# Altium PCB VoiceTouch_PCB_L6.PcbDoc (part 1 of 2)
Units mm, origin at the board's own origin, x right, y up, seen from the top; angles counter-clockwise.
Board outline 39 x 33.1 mm, 6 copper layers (L1, L2 (GND), L3, L4 (PWR), L5 (GND), L6), stack 0.726 mm thick; 65 components, 88 nets, 317 pads, 56 vias.
Unrouted connection lines stored in the file: 149.
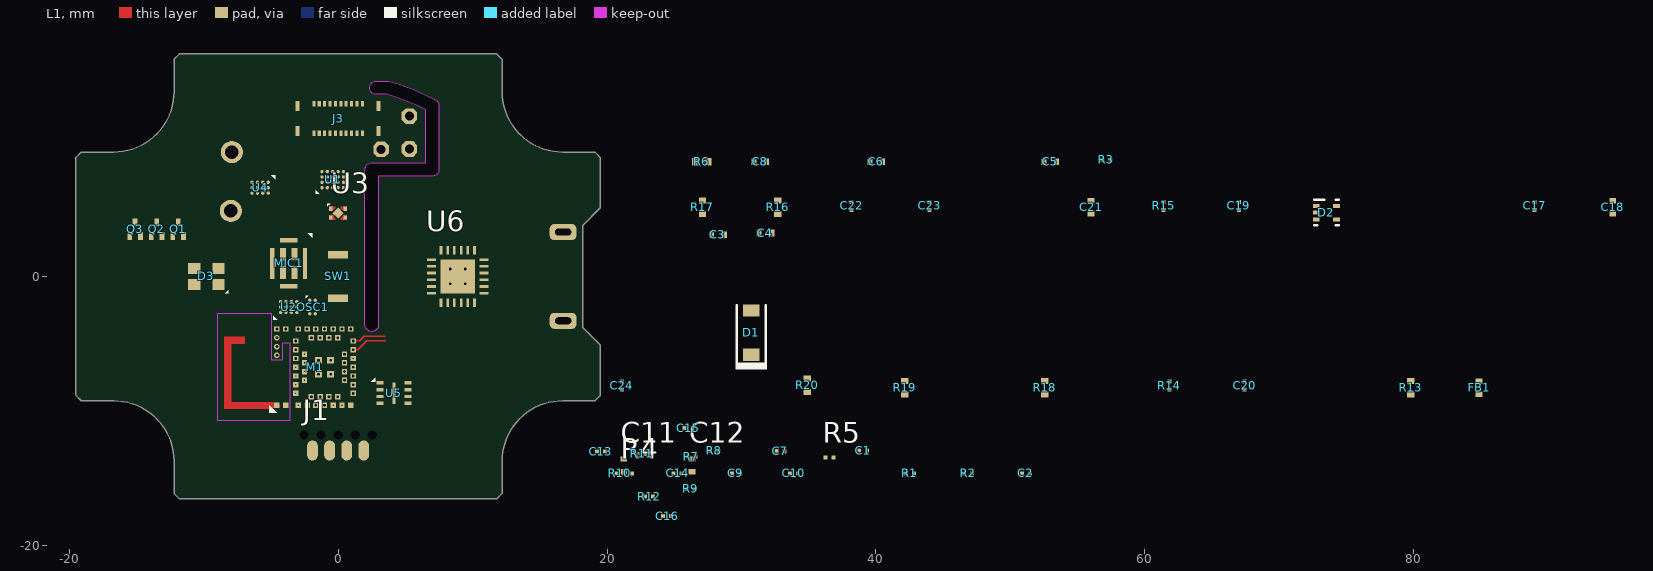
[diagram p0: L1 view]
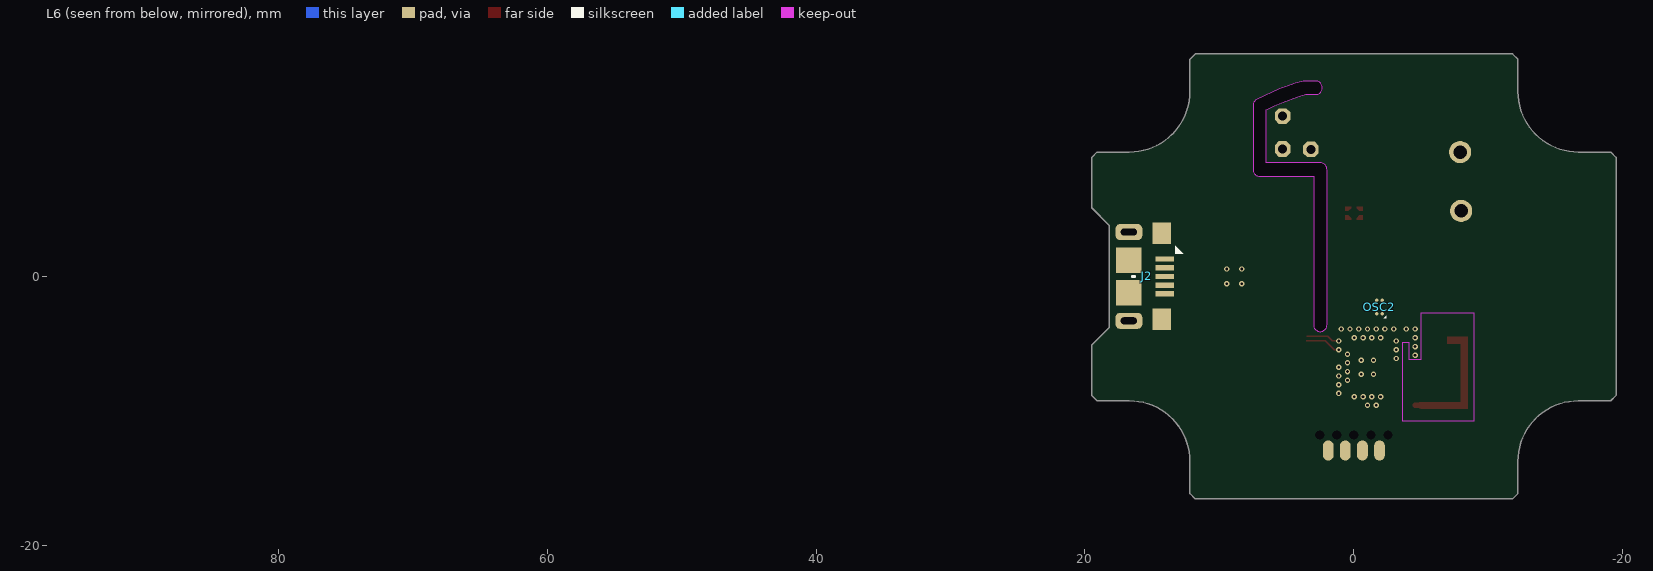
[diagram p1: L6 view, seen from below]
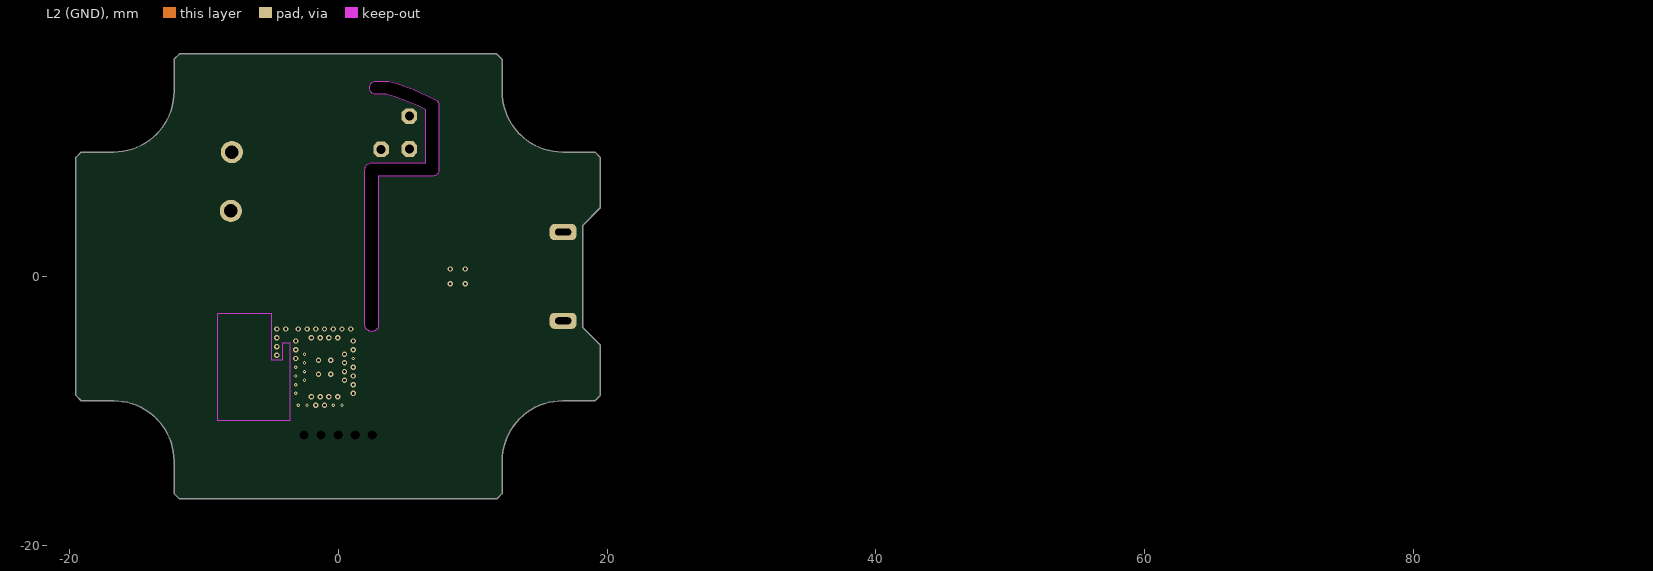
[diagram p2: L2 (GND)]
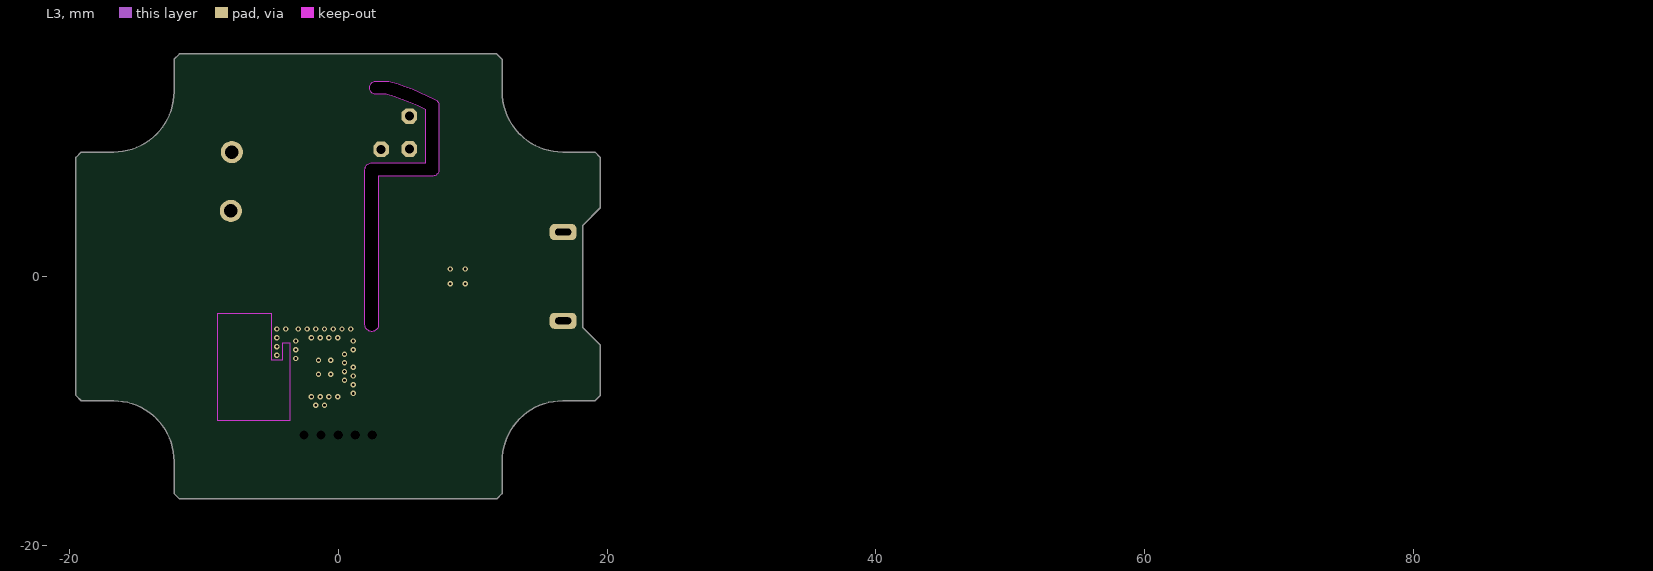
[diagram p3: L3]
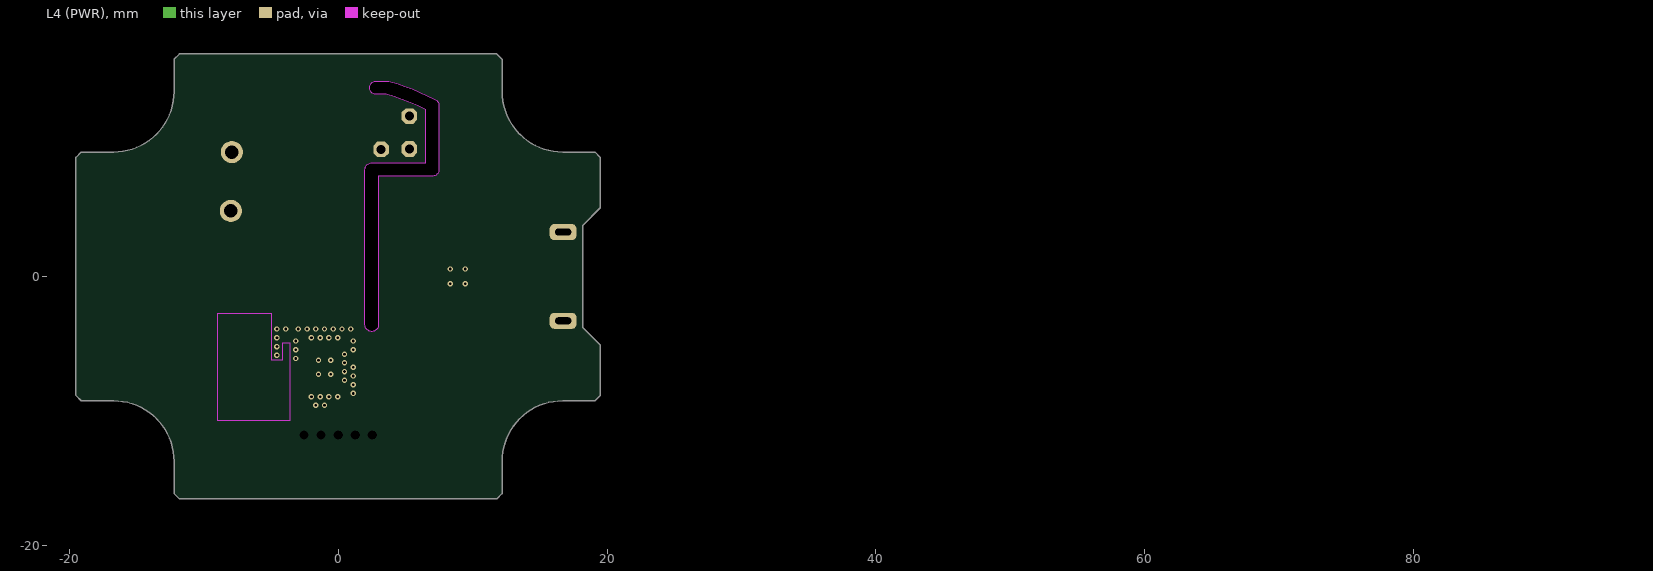
[diagram p4: L4 (PWR)]
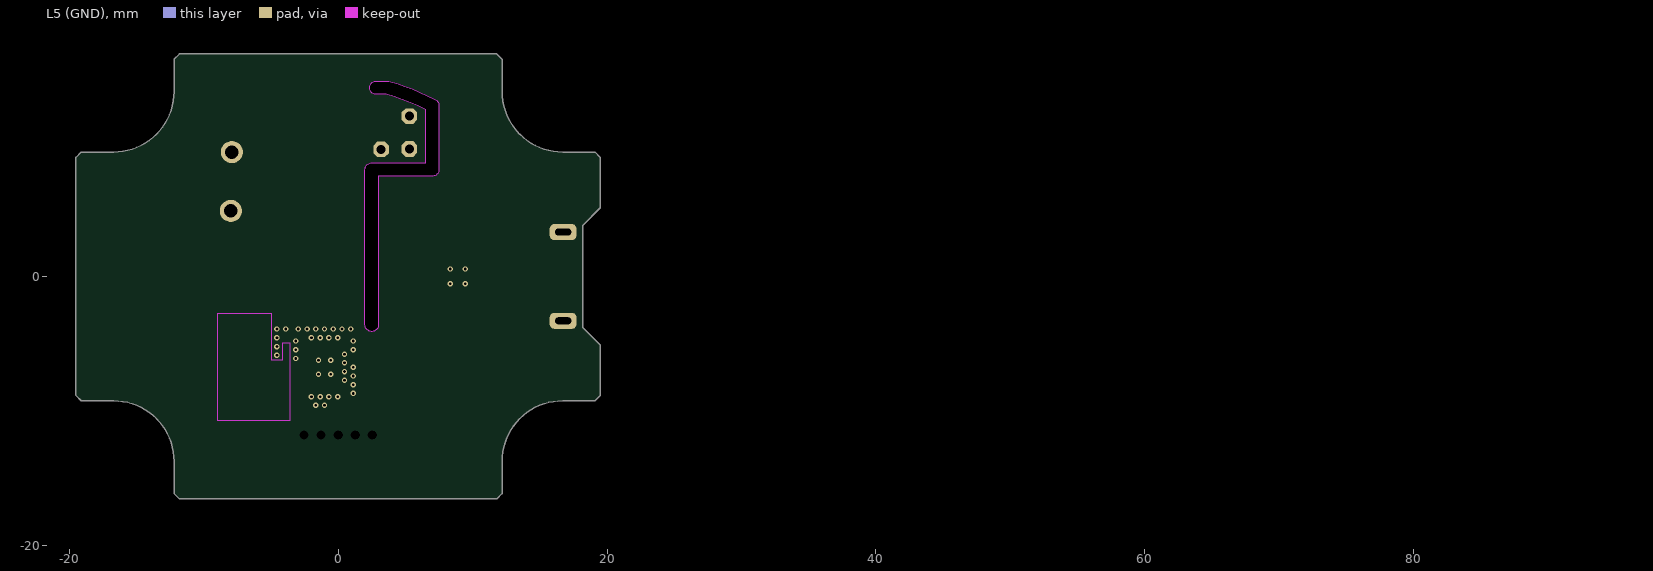
[diagram p5: L5 (GND)]

## Layer stack, top to bottom
Top Solder: solder mask 0.02, SM-001, Dk 4.2
L1: signal copper 0.012
Dielectric 1: prepreg 0.06, PP-01, Dk 4.5
L2 (GND): signal copper 0.018
Dielectric 2: core 0.2, Core-01, Dk 4.5
L3: signal copper 0.018
Dielectric 3: prepreg 0.11, PP-02, Dk 4.5
L4 (PWR): signal copper 0.018
Dielectric 4: core 0.2, Core-01, Dk 4.5
L5 (GND): signal copper 0.018
Dielectric 5: prepreg 0.06, PP-01, Dk 4.5
L6: signal copper 0.012
Bottom Solder: solder mask 0.02, SM-001, Dk 4.2

## Board outline
-19.1,-9.25 -16.7,-9.25 cw(c-16.7,-13.75) -12.2,-13.75 -12.2,-16.15 -11.8,-16.55 11.8,-16.55 12.2,-16.15 12.2,-13.75 cw(c16.7,-13.75) 16.7,-9.25 19.1,-9.25 19.5,-8.85 19.5,-5.103 18.207,-3.81 18.207,3.81 19.5,5.103 19.5,8.85 19.1,9.25 16.7,9.25 cw(c16.7,13.75) 12.2,13.75 12.2,16.15 11.8,16.55 -11.8,16.55 -12.2,16.15 -12.2,13.75 cw(c-16.7,13.75) -16.7,9.25 -19.1,9.25 -19.5,8.85 -19.5,-8.85
cut-out: 2,-3.6 2,7.95 cw(c2.5,7.95) 2.5,8.45 6.5,8.45 6.5,12.399 ccw(c0,0) 3.581,13.534 2.848,13.534 cw(c2.848,14.034) 2.848,14.535 3.645,14.535 cw(c3.645,14.034) 3.771,14.519 cw(c0,0) 7.173,13.174 cw(c7,12.705) 7.5,12.705 7.5,7.95 cw(c7,7.95) 7,7.45 3,7.45 3,-3.6 cw(c2.5,-3.6)

## Design rules (kind name [scope] priority, off if disabled: settings)
AcuteAngle [All] p1: minimum=4.49000000000000E+0001 checktracksonly=FALSE
BoardOutlineClearance BoardOutlineClearance_Silk [OnLayer('Top Overlay') or OnLayer('Bottom Overlay')] p1: gap=0 ignorepadtopadclearanceinfootprint=FALSE
BoardOutlineClearance BoardOutlineClearance_Text [IsText] p2: gap=0 ignorepadtopadclearanceinfootprint=FALSE
BoardOutlineClearance BoardOutlineClearance_EdgeComponents [InPadClass('Edge Pads')] p3: gap=0 ignorepadtopadclearanceinfootprint=FALSE
BoardOutlineClearance [All] p4: gap=0.3 ignorepadtopadclearanceinfootprint=FALSE except(0: THPad-CutoutEdge)
Clearance Clearance_Fiducials [InComponentClass('Fiducial') vs InComponentClass('Fiducial')] p1: gap=0 ignorepadtopadclearanceinfootprint=FALSE
Clearance "Clearance_ANTENNA to Keepout" [InNet('ANTENNA_STRIP') vs OnLayer('Keep-Out Layer')] p2: gap=0 ignorepadtopadclearanceinfootprint=FALSE
Clearance "Clearance_Poly to Keepout" [IsRegion vs OnLayer('Keep-Out Layer')] p3: gap=0.1 ignorepadtopadclearanceinfootprint=FALSE
Clearance "Clearance_Poly to Inner Layers" [IsRegion and InLayerClass('Internal Layers')] p4: gap=0.15 ignorepadtopadclearanceinfootprint=FALSE
Clearance "Clearance_Poly to all" [IsRegion and InNet('GND')] p5: gap=0.15 ignorepadtopadclearanceinfootprint=FALSE
Clearance Clearance_NPTH [(InPadClass('NPTH'))] p6: gap=0.2 ignorepadtopadclearanceinfootprint=FALSE
Clearance [All] p7: gap=0.1 ignorepadtopadclearanceinfootprint=FALSE
ComponentClearance ComponentClearance_J2_J4 [InComponent('J2') vs InComponent('J4')] p1: gap=0 collisioncheckmode=3 verticalgap=0 showdistances=FALSE
ComponentClearance ComponentClearance_R5_R2 [InComponent('R5') vs InComponent('R2')] p2: gap=0 collisioncheckmode=3 verticalgap=0 showdistances=FALSE
ComponentClearance ComponentClearance_R8_R12 [InComponent('R8') vs InComponent('R12')] p3: gap=0 collisioncheckmode=3 verticalgap=0 showdistances=FALSE
ComponentClearance ComponentClearance_TESTPOINTS [InComponentClass('TESTPOINTS')] p4: gap=0 collisioncheckmode=3 verticalgap=0 showdistances=FALSE
ComponentClearance [All] p5: gap=0.1 collisioncheckmode=3 verticalgap=0.1 showdistances=FALSE
DiffPairsRouting [All] p1: maxlimit=0.165 minlimit=0.155 mostfreqgap=0.165 toplayer_mingap=0.165 toplayer_minwidth=0.105 toplayer_maxwidth=0.105 toplayer_prefwidth=0.105 midlayer1_maxgap=0.155 midlayer1_prefgap=0.155 midlayer1_minwidth=0.13 midlayer1_maxwidth=0.13 midlayer1_prefwidth=0.13 midlayer2_maxgap=0.155 midlayer2_prefgap=0.155 midlayer2_minwidth=0.13 midlayer2_maxwidth=0.13 midlayer2_prefwidth=0.13 midlayer3_mingap=0.165 midlayer3_minwidth=0.105 midlayer3_maxwidth=0.105 midlayer3_prefwidth=0.105 midlayer4_mingap=0.165 midlayer4_minwidth=0.105 midlayer4_maxwidth=0.105 midlayer4_prefwidth=0.105 bottomlayer_mingap=0.165 bottomlayer_minwidth=0.105 bottomlayer_maxwidth=0.105 bottomlayer_prefwidth=0.105 maxuncoupledlength=12.7
HoleSize [All] p1: absolutevalues=TRUE maxlimit=6.5 minlimit=0.1 maxpercent=80.000 minpercent=20.000
HoleToHoleClearance [All] p1: gap=0.2 allowstackedmicrovias=TRUE
Length [InNetClass('Xtal')] p1: maxlimit=2540 minlimit=0
MinimumAnnularRing MinimumAnnularRing_ThermalPadVias [IsVia and InAnyComponent] p1: minimumring=0.1
MinimumAnnularRing MinimumAnnularRing_MicroVia [IsVia AND (HoleSize = 0.1)] p2: minimumring=0.05
MinimumAnnularRing [All] p3: minimumring=0.1
MinimumSolderMaskSliver [All] p1: minsoldermaskwidth=0.03
PlaneClearance [All] p1: clearance=0.2
PlaneConnect [All] p1: planeconnectstyle=Direct reliefexpansion=0.1 reliefentries=4 reliefconductorwidth=0.1 reliefairgap=0.1
PolygonConnect [All] p1: connectstyle=Direct reliefconductorwidth=0.1 reliefentries=4 polygonreliefangle="90 Angle" airgapwidth=0.1
RoutingVias ThermalPadVias [IsVia and InAnyComponent] p1: holewidth=0.2 width=0.45 viastyle="Through Hole" minholewidth=0.2 minwidth=0.4 maxholewidth=0.25 maxwidth=0.5
RoutingVias [All] p2: holewidth=0.2 width=0.4 viastyle="Through Hole" minholewidth=0.1 minwidth=0.2 maxholewidth=0.3 maxwidth=0.55
SMDEntry [All] p1: side=TRUE corner=TRUE anyangle=TRUE
SilkToSilkClearance [All] p1: silktosilkclearance=0
SilkToSolderMaskClearance [IsPad] p1: minsilkscreentomaskgap=0.1 clearancetoexposedcopper=TRUE
SolderMaskExpansion [All] p1: expansion=0.07 istentingtop=FALSE useseparateexpansions=TRUE expansionbottom=0.07 istentingbottom=FALSE
Width Width_Power [InNet('+*') or InNet('GND')] p1: maxlimit=1 minlimit=0.15 preferedwidth=0.25
Width [All] p2: maxlimit=1 minlimit=0.1 preferedwidth=0.1
21 further rules are at their usual default settings.

## Classes and differential pairs
net class DIFF90: USB_CP_D_N USB_CP_D_P
net class "GPIO Restrictions": P0.22 P0.23 P0.25 P0.26 P0.27 P0.28 P0.29 P0.30 P.0.31
differential pair USB_CP_D: +USB_CP_D_P -USB_CP_D_N

## Components (designator, comment, footprint, x,y, rotation, side; value= is the part's Value field where it differs from the comment)
C1 "100nF" CAPC0603X03N 39.05,-12.95 r0 top
C2 "100nF" CAPC0603X03N 51.155,-14.649 r0 top
C3 "4.7uF" CAPC1005X06N 28.25,3.1 r0 top
C4 "1uF" CAPC1005X06N 31.775,3.225 r0 top
C5 "2.2uF" CAPC1005X06N 52.959,8.527 r0 top
C6 "1uF" CAPC1005X06N 40.009,8.527 r0 top
C7 "100nF" CAPC0603X03N 32.9,-13 r0 top
C8 "4.7uF" CAPC1005X06N 31.383,8.527 r0 top
C9 "100nF" CAPC0603X03N 29.579,-14.649 r0 top
C10 "100nF" CAPC0603X03N 33.904,-14.649 r0 top
C11 "1uF" CAPC1005X06N 21.254,-14.049 r90 top
C12 "1uF" CAPC1005X06N 26.329,-14.049 r90 top
C13 "100nF" CAPC0603X03N 19.55,-13.025 r0 top
C14 "100nF" CAPC0603X03N 25.254,-14.649 r0 top
C15 "100nF" CAPC0603X03N 26.05,-11.275 r0 top
C16 "100nF" CAPC0603X03N 24.475,-17.825 r0 top
C17 "100nF" CAPC0603X03N 89,5.25 r90 top
C18 "4.7uF" CAPC1005X06N 94.8,5.15 r90 top
C19 "100nF" CAPC0603X03N 67,5.25 r90 top
C20 "100nF" CAPC0603X03N 67.431,-8.123 r90 top
C21 "1uF" CAPC1005X06N 56,5.15 r90 top
C22 "100nF" CAPC0603X03N 38.2,5.25 r90 top
C23 "100nF" CAPC0603X03N 44,5.25 r90 top
C24 "100nF" CAPC0603X03N 21.104,-8.123 r90 top
D1 "B140HW-7" SOD-123 30.725,-4.175 r90 top
D2 "TPD2E001DRLRG4" DRL0005A 73.5,4.75 r0 top
D3 "ASMB-KTF0-0A306" LED_ASMB-KTF0-0A306 -9.8,0 r180 top
FB1 "1K" INDC1005X05N 84.857,-8.273 r90 top
J1 "SOICbite" SOICBITE 0,-13.696 r0 top
J2 "10118193-0001LF" 10118193 15.4,0 r270 bottom
J3 "BM20B(0.8)-20DS-0.4V(53)" BM20B(0.8)-20DS-0.4V(53) 0,11.746 r0 top
M1 "ANNA-B112-00B" ANNA-B112 -1.711,-6.75 r90 top
MIC1 "SPK0641HT4H-1" MIC_SPK0838HT4H-1 -3.675,0.975 r180 top
OSC1 "SIT1532AC-J5-DCC-32.768E" SIT1532 -1.9,-2.275 r270 top
OSC2 "SIT8021AI-J4-18S-2.048000E" SIT1532 -1.9,-2.275 r90 bottom
Q1 "DTC143ZMT2L" SOTFL40P120X55-3N -11.9,3.5 r90 top
Q2 "DTC143ZMT2L" SOTFL40P120X55-3N -13.5,3.5 r90 top
Q3 "DTC143ZMT2L" SOTFL40P120X55-3N -15.1,3.5 r90 top
R1 "100K" RESC0603X02N 42.53,-14.649 r0 top
R2 "10K" RESC0603X02N 46.855,-14.649 r0 top
R3 "100R" RESC0603X02N 57.134,8.677 r0 top
R4 "10K" RESC0603X02N 21.554,-14.649 r0 top
R5 "10K" RESC0603X02N 36.555,-13.449 r0 top
R6 "10K NTC" NTC1005X05N 27.058,8.527 r0 top
R7 "100R" RESC0603X02N 26.275,-13.4 r0 top
R8 "100R" RESC0603X02N 27.975,-12.975 r0 top
R9 "10K" RESC0603X02N 26.225,-15.8 r0 top
R10 "10K" RESC0603X02N 20.954,-14.649 r0 top
R11 "10K" RESC0603X02N 22.575,-13.2 r0 top
R12 "10K" RESC0603X02N 23.125,-16.375 r0 top
R13 "0R" RESC1005X04N 79.782,-8.273 r90 top
R14 "100R" RESC0603X02N 61.831,-8.123 r90 top
R15 "10K" RESC0603X02N 61.4,5.25 r90 top
R16 "0R" RESC1005X04N 32.7,5.15 r90 top
R17 "0R" RESC1005X04N 27.1,5.15 r90 top
R18 "100R" RESC1005X04N 52.555,-8.273 r90 top
R19 "33R" RESC1005X04N 42.13,-8.273 r90 top
R20 "47R" RESC1005X04N 34.9,-8.1 r90 top
SW1 "TL3780AF240QG" TL3780 -0.001,0 r270 top
U1 "BQ25150YFPR" YFP0020ACAC -0.4,7.2 r90 top
U2 "NDP100B0" NDP100B0_BGA12C40P3X4_139X176X55 -3.675,-2.275 r90 top
U3 "TCR3UM09A,LF" DQN-4 0,4.708 r0 top
U4 "DA7280-00V42" BGA12C40P3X4_135X175X57 -5.8,6.6 r270 top
U5 "MX25R8035FZUIL0" USON8_3X2 4.15,-8.675 r0 top
U6 "CP2102N-A02-GQFN24R" QFN50P400X400X75_HS-25N_CP2104 8.899,0 r0 top

## Footprints (in the part's own frame and the unit in brackets; to place one, negate y for a bottom-side part, rotate by r counter-clockwise, add the part's x,y. Pads: shape width x height; smd on the part's side, far side on the other; paste and mask are expansions set on the pad)
10118193 [mm]
  rect 0.4x1.35 smd mask+0.05: 1(-1.3,1.338) 2(-0.65,1.338) 3(0,1.338) 4(0.65,1.338) 5(1.3,1.338)
  rect 1.6x1.4 smd: 6(-3.2,1.113) 7(3.2,1.113)
  rrect60% 1.2x2 hole 0.5 slot 1.2 at 90 deg: 8(-3.3,-1.338) 9(3.3,-1.338)
  rect 1.9x1.9 smd paste-10: 10(-1.2,-1.338) 11(1.2,-1.338)
  silkscreen extent -2.29,-1.09 0,2.73, body extent -3.93,-4.1 3.93,1.56, height 2.85
ANNA-B112 [mm]
  rect 0.4x0.4 smd mask+0.05: 1(-2.84,2.84) 2(-2.84,2.19) 3(-2.84,1.248) 4(-2.84,0.598) 5(-2.84,-0.052) 6(-2.84,-0.702) 7(-2.84,-1.352) 8(-2.84,-2.002) 9(-2.84,-2.652) 10(-2.19,0.273) 11(-2.19,-0.377) 12(-2.19,-1.027) 13(-2.19,-1.677) 14(-1.95,-2.84) 15(-1.3,-2.84) 16(-0.65,-2.84) 17(0,-2.84) 18(0.65,-2.84) 19(1.3,-2.84) 20(1.95,-2.84) 21(-0.975,-2.19) 22(-0.325,-2.19) 23(0.325,-2.19) 24(0.975,-2.19) 25(2.84,-2.652) 26(2.84,-2.002) 27(2.84,-1.352) 28(2.84,-0.702) 29(2.84,-0.052) 30(2.84,0.598) 31(2.84,1.248) 32(2.84,2.19) 33(2.84,2.84) 34(2.19,-1.677) 35(2.19,-1.027) 36(2.19,-0.377) 37(2.19,0.273) 38(1.95,1.435) 39(1.3,1.435) 40(0.65,1.435) 41(0,1.435) 42(-0.65,1.435) 43(-1.3,1.435) 44(-1.95,1.435) 45(0.975,0.785) 46(0.325,0.785) 47(-0.325,0.785) 48(-0.975,0.785)
  rect 0.5x0.5 smd mask+0.05: 49(-0.52,-0.252) 50(-0.52,-1.152) 51(0.52,-0.252) 52(0.52,-1.152)
  silkscreen extent -3.39,2.84 -2.82,3.41, body extent -3.25,-3.25 3.25,3.25, height 1.26
BGA12C40P3X4_135X175X57 [mm] "BGA, 12-Leads, Body 1.35x1.75mmx0.57mm, Pitch 0.40mm"
  round 0.25 smd mask+0.05: A1(-0.4,0.6) A2(0,0.6) A3(0.4,0.6) B1(-0.4,0.2) B2(0,0.2) B3(0.4,0.2) C1(-0.4,-0.2) C2(0,-0.2) C3(0.4,-0.2) D1(-0.4,-0.6) D2(0,-0.6) D3(0.4,-0.6)
  round 0.25 on Mech2 mask+0.05: A1(-0.4,0.6)
  silkscreen extent -0.93,0.82 -0.63,1.12, body extent -0.67,-0.87 0.67,0.87, height 0.58
BM20B(0.8)-20DS-0.4V(53) [mm]
  rect 0.23x0.42 smd mask+0.03: 1(-1.8,-1.09) 2(-1.8,1.09) 3(-1.4,-1.09) 4(-1.4,1.09) 5(-1,-1.09) 6(-1,1.09) 7(-0.6,-1.09) 8(-0.6,1.09) 9(-0.2,-1.09) 10(-0.2,1.09) 11(0.2,-1.09) 12(0.2,1.09) 13(0.6,-1.09) 14(0.6,1.09) 15(1,-1.09) 16(1,1.09) 17(1.4,-1.09) 18(1.4,1.09) 19(1.8,-1.09) 20(1.8,1.09)
  rect 0.3x0.75 smd mask+0.03: SH1(-3.01,-0.925) SH2(-3.01,0.925) SH3(3.01,-0.925) SH4(3.01,0.925)
  body extent -3.24,-1.15 3.24,1.15, height 0.81
CAPC0603X03N [mm] "Chip Capacitor, 2-Leads, Body 0.60x0.30mm, IPC Medium Density"
  rect 0.3x0.3 smd mask+0.05: 1(-0.3,0) 2(0.3,0)
  L1 pour cut-out: -0.15,0.15 0.15,0.15 0.15,-0.15 -0.15,-0.15
  body extent -0.3,-0.15 0.3,0.15, height 0.3
CAPC1005X06N [mm] "Chip Capacitor, 2-Leads, Body 1.00x0.50mm, IPC Medium Density"
  rect 0.4x0.5 smd mask+0.07: 1(-0.475,0) 2(0.475,0)
  L1 pour cut-out: -0.275,0.25 0.275,0.25 0.275,-0.25 -0.275,-0.25
  body extent -0.53,-0.28 0.53,0.28, height 0.55
DQN-4 [mm]
  rect 0.25x0.31 smd paste-0.142 mask-0.05: 1(-0.535,0.325) 2(-0.535,-0.325) 3(0.535,-0.325)
  rect 0.25x0.31 smd paste-2 mask-0.05: 4(0.535,0.325)
  rect 0.58x0.58 smd rot 45 paste-0.065 mask-0.051: 5(0,0)
  L1 region: -0.66,-0.17 -0.66,-0.48 -0.2,-0.48 -0.2,-0.379 -0.409,-0.17
  L1 region: -0.66,0.17 -0.66,0.48 -0.2,0.48 -0.2,0.379 -0.409,0.17
  L1 region: 0.66,0.17 0.66,0.48 0.2,0.48 0.2,0.379 0.409,0.17
  L1 region: 0.66,-0.17 0.66,-0.48 0.2,-0.48 0.2,-0.379 0.409,-0.17
  silkscreen extent -0.8,0.5 -0.6,0.7, body extent -0.5,-0.5 0.5,0.5, height 0.35
DRL0005A [mm]
  rect 0.5x0.3 smd mask+0.05: 1(-0.75,0.5) 2(-0.75,0) 3(-0.75,-0.5) 4(0.75,-0.5) 5(0.75,0.5)
  silkscreen extent -0.9,-0.95 0.9,0.95, body extent -0.85,-0.85 0.85,0.85, height 0.62
INDC1005X05N [mm] "Chip Inductor, 2-Leads, Body 1.00x0.50mm, IPC Medium Density"
  rect 0.4x0.5 smd mask+0.07: 1(-0.475,0) 2(0.475,0)
  L1 pour cut-out: -0.275,0.25 0.275,0.25 0.275,-0.25 -0.275,-0.25
  body extent -0.53,-0.28 0.53,0.28, height 0.55
LED_ASMB-KTF0-0A306 [mm]
  rect 0.9x0.8 smd mask+0.05: 1(-0.9,0.6) 2(-0.9,-0.6) 3(0.9,-0.6) 4(0.9,0.6)
  silkscreen extent -1.64,1.01 -1.41,1.24, body extent -1.1,-1 1.1,1, height 1.91
MIC_SPK0838HT4H-1 [mm]
  rect 0.45x0.95 smd mask+0.07: 1(-0.425,-0.675) 2(-0.425,0.675) 3(0.425,0.675) 4(0.425,-0.675)
  rect 1.3x0.325 smd mask+0.07: 5(0,-1.712) 7(0,1.713)
  rect 0.325x2.3 smd mask+0.07: 6(-1.212,0) 8(1.213,0)
  silkscreen extent -1.75,-2.25 -1.4,-1.9, body extent -1.5,-2 1.5,2, height 1.02
NDP100B0_BGA12C40P3X4_139X176X55 [mm] "BGA, 12-Leads, Body 1.39x1.76mmx0.55mm, Pitch 0.40mm"
  round 0.25 smd mask+0.04: A1(-0.4,0.6) A2(0,0.6) A3(0.4,0.6) B1(-0.4,0.2) B2(0,0.2) B3(0.4,0.2) C1(-0.4,-0.2) C2(0,-0.2) C3(0.4,-0.2) D1(-0.4,-0.6) D2(0,-0.6) D3(0.4,-0.6)
  silkscreen extent -0.95,0.86 -0.66,1.15, body extent -0.69,-0.88 0.7,0.88, height 0.55
NTC1005X05N [mm] "NTC, 2-Leads, Body 1.00x0.50mm, IPC Medium Density"
  rect 0.55x0.55 smd mask+0.07: 1(-0.45,0) 2(0.45,0)
  body extent -0.5,-0.25 0.5,0.25, height 0.5
QFN50P400X400X75_HS-25N_CP2104 [mm] "QFN, 24-Leads, Body 4.00x4.00mm, Pitch 0.50mm, Thermal Pad 2.70x2.70mm, IPC Medium Density"
  rect 0.65x0.2 smd mask+0.05: 1(-1.95,1.25) 2(-1.95,0.75) 3(-1.95,0.25) 4(-1.95,-0.25) 5(-1.95,-0.75) 6(-1.95,-1.25) 13(1.95,-1.25) 14(1.95,-0.75) 15(1.95,-0.25) 16(1.95,0.25) 17(1.95,0.75) 18(1.95,1.25)
  rect 0.2x0.65 smd mask+0.05: 7(-1.25,-1.95) 8(-0.75,-1.95) 9(-0.25,-1.95) 10(0.25,-1.95) 11(0.75,-1.95) 12(1.25,-1.95) 19(1.25,1.95) 20(0.75,1.95) 21(0.25,1.95) 22(-0.25,1.95) 23(-0.75,1.95) 24(-1.25,1.95)
  rect 2.55x2.55 smd mask+0.05: 25(0,0)
  body extent -2,-2 2,2, height 0.75
RESC0603X02N [mm] "Chip Resistor, 2-Leads, Body 0.60x0.30mm, IPC Medium Density"
  rect 0.3x0.3 smd mask+0.05: 1(-0.3,0) 2(0.3,0)
  L1 pour cut-out: -0.15,0.15 0.15,0.15 0.15,-0.15 -0.15,-0.15
  body extent -0.3,-0.15 0.3,0.15, height 0.23
RESC1005X04N [mm] "Chip Resistor, 2-Leads, Body 1.00x0.50mm, IPC Medium Density"
  rect 0.45x0.55 smd: 1(-0.5,0)
  rect 0.45x0.55 smd mask+0.07: 2(0.5,0)
  L1 pour cut-out: -0.275,0.275 0.275,0.275 0.275,-0.275 -0.275,-0.275
  body extent -0.53,-0.28 0.53,0.28, height 0.35
SIT1532 [mm]
  round 0.25 smd mask+0.05: 1(-0.5,-0.205) 2(0.5,-0.205) 3(0.5,0.205) 4(-0.5,0.205)
  silkscreen extent -0.85,-0.53 -0.65,-0.33, body extent -0.77,-0.42 0.77,0.42, height 0.61
SOD-123 [mm]
  rect 0.915x1.22 smd: 1(-1.638,0) 2(1.638,0)
  silkscreen extent -2.74,-1.18 2.03,1.17, body extent -1.93,-0.9 1.93,0.9, height 1.35
SOICBITE [mil]
  rrect100% 31.5x59.06 smd paste-39.37 mask+1.97: 1(75,29.53) 2(25,29.53) 3(-25,29.53) 4(-75,29.53)
  rrect100% 31.5x59.06 smd far side paste-39.37 mask+1.97: 5(-75,29.53) 6(-25,29.53) 7(25,29.53) 8(75,29.53)
  round 0 hole 27.56 unplated mask-196.85: MH1(-100,75) MH2(-50,75) MH3(0,75) MH4(50,75) MH5(100,75)
SOTFL40P120X55-3N [mm] "SOTFL, 3-Leads, Body 1.20x1.20mm, Pitch 0.40mm, IPC Medium Density"
  rect 0.6x0.35 smd mask+0.05: 1(-0.5,0.4) 2(-0.5,-0.4) 3(0.5,0)
  body extent -0.6,-0.65 0.6,0.65, height 0.55
TL3780 [mm]
  rect 0.55x1.5 smd: 1(-1.625,0) 2(1.625,0)
  body extent -1.75,-1 1.75,1, height 0.6
USON8_3X2 [mil]
  rect 19.68x10 smd mask+1.97: 1(-41,30) 2(-41,10) 3(-41,-10) 4(-41,-30) 5(41,-30) 6(41,-10) 7(41,10) 8(41,30)
  rect 7.87x62.99 smd mask+1.97: 9(0,0)
  silkscreen extent -67,33 -55,45, body extent -48,-39 48,39, height 24
YFP0020ACAC [mm]
  round 0.25 smd paste-0.13 mask+0.038: A1(-0.6,0.8) A2(-0.2,0.8) A3(0.2,0.8) A4(0.6,0.8) B1(-0.6,0.4) B2(-0.2,0.4) B3(0.2,0.4) B4(0.6,0.4) C1(-0.6,0) C2(-0.2,0) C3(0.2,0) C4(0.6,0) D1(-0.6,-0.4) D2(-0.2,-0.4) D3(0.2,-0.4) D4(0.6,-0.4) E1(-0.6,-0.8) E2(-0.2,-0.8) E3(0.2,-0.8) E4(0.6,-0.8)
  silkscreen extent -1.05,1 -0.8,1.25, body extent -0.82,-1.02 0.83,1.03, height 0.5

## Part data
C1 C2 C7 C9 C10 C13 C14 C15 C16 C17 C19 C20 C22 C23 C24: library part GRM033C71C104ME14D, "CAP CER 0.1UF 16V X7S 0201", Case Code (Imperial)=0201, Case Code (Metric)=0603, Dielectric=X7S, Manufacturer=Murata, Max Operating Temperature=125°C, Min Operating Temperature=-55°C, Package Quantity=15000, Supplier Part Number 1=490-10388-1-ND, Tolerance=20%, Voltage Rating=16V, Capacitance=100nF, Case/Package=0201, Category="Ceramic Capacitors", ComponentLink1Description=http://www.mouser.com/ds/2/281/c02e-2905.pdf?src-supplier=Mouser, ComponentLink1URL=http://www.mouser.com/ds/2/281/c02e-2905.pdf?src-supplier=Mouser, ComponentLink2Description=http://search.murata.co.jp/Ceramy/image/img/A01X/G101/ENG/GRM033C71C104ME14-01.pdf?src-supplier=Digi-Key, ComponentLink2URL=http://search.murata.co.jp/Ceramy/image/img/A01X/G101/ENG/GRM033C71C104ME14-01.pdf?src-supplier=Digi-Key, Height=0.3mm, Length=0.024inch, Manufacturer Part Number=GRM033C71C104ME14D, Mount="Surface Mount", Packaging="Tape and Reel", Pricing 1="1=0.10000, 10=0.05100, 50=0.02780, 100=0.02260, 500=0.01616, 1000=0.01270, 2500=0.01155, 5000=0.01063 (USD)", RoHS=Yes, RoHS Compliant=Yes, Stock 1=1023970, Supplier 1=Digi-Key, Termination=SMD/SMT, Thickness=0.013inch, Voltage Rating (DC)=16V, Weight=1.2E-05oz, Width=0.012inch
C3 C8 C18: library part CL05A475MO5NUNC, "CAP CER 4.7UF 16V X5R 0402", Case Code (Imperial)=0402, Case Code (Metric)=1005, Manufacturer=Samsung, Max Operating Temperature=85°C, Min Operating Temperature=-55°C, Supplier Part Number 1=1276-6836-1-ND, Tolerance=20%, Voltage Rating=16V, Capacitance=4.7uF, Case/Package=0402, Category 1=Capacitors, Category 2="Ceramic Capacitors", ComponentLink1Description=http://www.farnell.com/datasheets/2710653.pdf?src-supplier=Farnell, ComponentLink1URL=http://www.farnell.com/datasheets/2710653.pdf?src-supplier=Farnell, ComponentLink2Description=http://www.samsungsem.com/kr/support/product-search/mlcc/CL05A475MO5NUNC.jsp?src-supplier=Digi-Key, ComponentLink2URL=http://www.samsungsem.com/kr/support/product-search/mlcc/CL05A475MO5NUNC.jsp?src-supplier=Digi-Key, ComponentLink3Description=http://www.farnell.com/datasheets/2710653.pdf?src-supplier=Newark, ComponentLink3URL=http://www.farnell.com/datasheets/2710653.pdf?src-supplier=Newark, Length=0.039inch, Manufacturer 1=Samsung, Manufacturer Part Number=CL05A475MO5NUNC, Manufacturer Part Number 1=CL05A475MO5NUNC, Mount="Surface Mount", Packaging="Tape and Reel", Pricing 1="1=0.45000, 10=0.32100, 100=0.21130, 500=0.15656, 1000=0.13307, 2500=0.12524, 5000=0.11741 (USD)", RoHS=Yes, Stock 1=1960205, Supplier 1=Digi-Key, Thickness=0.022inch, Width=0.02inch
C4 C6 C11 C12 C21: library part CL05A105KO5NNNC, "CAP CER 1UF 16V X5R 0402", Case Code (Imperial)=0402, Case Code (Metric)=1005, Dielectric=X5R, Manufacturer=Samsung, Max Operating Temperature=85°C, Min Operating Temperature=-55°C, Package Quantity=1, Supplier Part Number 1=1276-1067-1-ND, Tolerance=10%, Voltage=16V, Capacitance=1uF, Case/Package=0402, Category="Ceramic Capacitors", ComponentLink1Description=https://datasheet.ciiva.com/16207/cl05a105ko5nnnc-16207571.pdf?src-supplier=Future+Electronics, ComponentLink1URL=https://datasheet.ciiva.com/16207/cl05a105ko5nnnc-16207571.pdf?src-supplier=Future+Electronics, ComponentLink2Description=https://datasheet.ciiva.com/15195/getdatasheetpartid-355272-15195629.pdf?src-supplier=Verical, ComponentLink2URL=https://datasheet.ciiva.com/15195/getdatasheetpartid-355272-15195629.pdf?src-supplier=Verical, Contact Plating=Tin, Depth=0.5mm, Height=0.5mm, Length=1mm, Manufacturer Part Number=CL05A105KO5NNNC, Mount="Surface Mount", Packaging="Tape and Reel", Pricing 1="1=0.10000, 10=0.04400, 50=0.02400, 100=0.01960, 500=0.01402, 1000=0.01101, 2500=0.01001, 5000=0.00921 (USD)", Radiation Hardening=No, RoHS=Yes, Stock 1=2455652, Supplier 1=Digi-Key, Thickness=0.022inch, Voltage Rating=16V, Width=0.02inch
C5: library part CL05A225KP7NSB8, "CAP CER 2.2UF 10V X5R 0402", Case Code (Imperial)=0402, Case Code (Metric)=1005, Manufacturer=Samsung, Max Operating Temperature=85°C, Min Operating Temperature=-55°C, Supplier Part Number 1=1276-6820-1-ND, Tolerance=10%, Voltage Rating=10V, Capacitance=2.2uF, Case/Package=0402, Category 1=Capacitors, Category 2="Ceramic Capacitors", ComponentLink1Description=http://www.samsungsem.com/kr/support/product-search/mlcc/CL05A225KP7NSB8.jsp?src-supplier=Digi-Key, ComponentLink1URL=http://www.samsungsem.com/kr/support/product-search/mlcc/CL05A225KP7NSB8.jsp?src-supplier=Digi-Key, Length=0.039inch, Manufacturer Part Number=CL05A225KP7NSB8, Mount="Surface Mount", Packaging="Tape and Reel", Pricing 1="1=0.37000, 10=0.25500, 100=0.14450, 500=0.10198, 1000=0.08924, 2500=0.08499 (USD)", RoHS=Yes, Stock 1=159500, Supplier 1=Digi-Key, Thickness=0.031inch, Width=0.02inch
D1: "Diode Schottky 40V 1A 2Pin SOD123", Average Rectified Current=1A, Forward Voltage=550mV, Manufacturer=Diodes, Max Forward Surge Current (Ifsm)=16A, Max Operating Temperature=125°C, Max Power Dissipation=410mW, Max Repetitive Reverse Voltage (Vrrm)=40V, Max Reverse Current=40uA, Min Operating Temperature=-65°C, Package Quantity=3000, Supplier Part Number 1=B140HWDICT-ND, Category="Rectifier Diodes", ComponentLink1Description=https://datasheet.ciiva.com/4715/ds30670-86720-4715619.pdf?src-supplier=Mouser, ComponentLink1URL=https://datasheet.ciiva.com/4715/ds30670-86720-4715619.pdf?src-supplier=Mouser, ComponentLink2Description=https://datasheet.ciiva.com/25946/ds30670-25946913.pdf?src-supplier=Avnet+Europe, ComponentLink2URL=https://datasheet.ciiva.com/25946/ds30670-25946913.pdf?src-supplier=Avnet+Europe, ComponentLink3Description=https://datasheet.ciiva.com/26788/b140hw-7-26788582.pdf?src-supplier=IIIC, ComponentLink3URL=https://datasheet.ciiva.com/26788/b140hw-7-26788582.pdf?src-supplier=IIIC, ComponentLink4Description=https://datasheet.ciiva.com/912/ds30670-912807.pdf?src-supplier=Digi-Key, ComponentLink4URL=https://datasheet.ciiva.com/912/ds30670-912807.pdf?src-supplier=Digi-Key, ComponentLink5Description=https://datasheet.ciiva.com/1177/ds30670-1177415.pdf?src-supplier=Element14, ComponentLink5URL=https://datasheet.ciiva.com/1177/ds30670-1177415.pdf?src-supplier=Element14, ComponentLink6Description=https://datasheet.ciiva.com/8303/ds30670-8303271.pdf?src-supplier=Avnet, ComponentLink6URL=https://datasheet.ciiva.com/8303/ds30670-8303271.pdf?src-supplier=Avnet, ComponentLink7Description=https://datasheet.ciiva.com/912/ds30670-912808.pdf?src-supplier=Digi-Key, ComponentLink7URL=https://datasheet.ciiva.com/912/ds30670-912808.pdf?src-supplier=Digi-Key, ComponentLink8Description=https://datasheet.ciiva.com/912/ds30670-912809.pdf?src-supplier=Digi-Key, ComponentLink8URL=https://datasheet.ciiva.com/912/ds30670-912809.pdf?src-supplier=Digi-Key, ComponentLink9Description=https://datasheet.ciiva.com/8301/ds30670-8301643.pdf?src-supplier=Avnet, ComponentLink9URL=https://datasheet.ciiva.com/8301/ds30670-8301643.pdf?src-supplier=Avnet, ComponentLink10Description=https://datasheet.ciiva.com/15220/getdatasheetpartid-245799-15220198.pdf?src-supplier=Verical, ComponentLink10URL=https://datasheet.ciiva.com/15220/getdatasheetpartid-245799-15220198.pdf?src-supplier=Verical, Contact Plating=Tin,Matte, Current Rating=1A, Element Configuration=Single, Forward Current=1A, Height=1.25mm, Lead Free="Lead Free", Length=2.85mm, Manufacturer Part Number=B140HW-7, Max Reverse Voltage (DC)=40V, Mount="Surface Mount", Number of Pins=2, Output Current=1A, Packaging="Tape and Reel", Peak Non-Repetitive Surge Current=16A, Polarity=Standard, Pricing 1="1=0.43000, 10=0.28300, 100=0.14140, 500=0.10504, 1000=0.07676 (USD)", Radiation Hardening=No, REACH SVHC="No SVHC", RoHS=Yes, Stock 1=132539, Supplier 1=Digi-Key, Voltage Rating (DC)=40V, Weight=0.000353oz, Width=1.7mm
D2: "TVS DIODE 5.5V SOT5", Breakdown Voltage=11V, Capacitance=1.5pF, Case/Package=SOT-553, Clamping Voltage=105.5V, Leakage Current=1nA, Manufacturer="Texas Instruments", Max Operating Temperature=85°C, Min Operating Temperature=-40°C, Operating Supply Voltage=5.5V, Package Quantity=1, Power Line Protection=Yes, Supplier Part Number 1=296-35960-1-ND, Category="Interface ICs", ComponentLink1Description=https://datasheet.ciiva.com/14423/tpd2e001-14423681.pdf?src-supplier=Avnet, ComponentLink1URL=https://datasheet.ciiva.com/14423/tpd2e001-14423681.pdf?src-supplier=Avnet, ComponentLink2Description=https://datasheet.ciiva.com/18551/tpd2e001-18551783.pdf?src-supplier=Digi-Key, ComponentLink2URL=https://datasheet.ciiva.com/18551/tpd2e001-18551783.pdf?src-supplier=Digi-Key, ComponentLink3Description=https://datasheet.ciiva.com/25956/tpd2e001-25956815.pdf?src-supplier=Avnet+Europe, ComponentLink3URL=https://datasheet.ciiva.com/25956/tpd2e001-25956815.pdf?src-supplier=Avnet+Europe, ComponentLink4Description=https://datasheet.ciiva.com/18551/tpd2e001-18551784.pdf?src-supplier=Digi-Key, ComponentLink4URL=https://datasheet.ciiva.com/18551/tpd2e001-18551784.pdf?src-supplier=Digi-Key, ComponentLink5Description=https://datasheet.ciiva.com/18551/tpd2e001-18551785.pdf?src-supplier=Digi-Key, ComponentLink5URL=https://datasheet.ciiva.com/18551/tpd2e001-18551785.pdf?src-supplier=Digi-Key, Contact Plating=Gold, Depth=1.3mm, Direction=Unidirectional, Element Configuration=Dual, Height=0.55mm, Interface=LVDS,USB,Ethernet, Lead Free="Lead Free", Length=1.7mm, Manufacturer Part Number=TPD2E001DRLRG4, Min Breakdown Voltage=11V, Number of Bidirectional Channels=2, Number of Channels=2, Number of Pins=5, Packaging="Tape and Reel", Polarity=Unidirectional, Pricing 1="1=0.56000, 10=0.48000, 25=0.44800, 100=0.33280, 250=0.31616, 500=0.25984, 1000=0.21120 (USD)", Radiation Hardening=No, Reverse Standoff Voltage=5.5V, RoHS=Yes, Stock 1=83573, Supplier 1=Digi-Key, Weight=9.9E-05oz, Width=1.2mm
D3: "LED RGB 4PLCC SMD", Case/Package=PLCC, Color=Blue,Green,Red, Forward Voltage=2.85V, Manufacturer=Broadcom, Supplier Part Number 1=516-3906-1-ND, Test Current=20mA, Category=LEDs, ComponentLink1Description=https://media.digikey.com/pdf/Data%20Sheets/Avago%20PDFs/ASMB-KTF0-0A306.pdf?src-supplier=Digi-Key, ComponentLink1URL=https://media.digikey.com/pdf/Data%20Sheets/Avago%20PDFs/ASMB-KTF0-0A306.pdf?src-supplier=Digi-Key, ComponentLink2Description=http://www.farnell.com/datasheets/2608172.pdf?src-supplier=Farnell, ComponentLink2URL=http://www.farnell.com/datasheets/2608172.pdf?src-supplier=Farnell, ComponentLink3Description=http://www.farnell.com/datasheets/2608172.pdf?src-supplier=Newark, ComponentLink3URL=http://www.farnell.com/datasheets/2608172.pdf?src-supplier=Newark, Dominant Wavelength=471nm, Height=2.1mm, Length=2.2mm, Lens Style=Flat,Square, Luminous Intensity=215mcd, Manufacturer Part Number=ASMB-KTF0-0A306, Mount="Surface Mount", Number of Pins=4, Packaging="Tape and Reel", Pricing 1="1=0.41000, 10=0.29400, 100=0.19210, 500=0.13938, 1000=0.10908, 2000=0.09999 (USD)", RoHS=No, Stock 1=70470, Supplier 1=Digi-Key, Viewing Angle=110°, Width=2mm
FB1: library part BLM15HG102SN1D, "FERRITE BEAD 1 KOHM 0402 1LN", Case Code (Imperial)=0402, Case Code (Metric)=1005, Current Rating=250mA, DC Resistance (DCR)=1.1R, Frequency=100MHz, Manufacturer=Murata, Max Operating Temperature=125°C, Min Operating Temperature=-55°C, Package Quantity=1, Supplier Part Number 1=490-3999-1-ND, Tolerance=25%, Case/Package=0402, Category="Ferrite Beads and Chips", ComponentLink1Description=https://datasheet.ciiva.com/18089/getdatasheetpartid-153017-18089624.pdf?src-supplier=Verical, ComponentLink1URL=https://datasheet.ciiva.com/18089/getdatasheetpartid-153017-18089624.pdf?src-supplier=Verical, ComponentLink2Description=https://datasheet.ciiva.com/11799/0900766b811b5866-11799183.pdf?src-supplier=RSComponents, ComponentLink2URL=https://datasheet.ciiva.com/11799/0900766b811b5866-11799183.pdf?src-supplier=RSComponents, ComponentLink3Description=https://datasheet.ciiva.com/29347/442241-da-01-en-chip-drossel-0402-1000r-250ma-1-0x0-5mm-29347884.pdf?src-supplier=Conrad, ComponentLink3URL=https://datasheet.ciiva.com/29347/442241-da-01-en-chip-drossel-0402-1000r-250ma-1-0x0-5mm-29347884.pdf?src-supplier=Conrad, ComponentLink4Description=https://datasheet.ciiva.com/41449/001172203-da-01-en-drossel-0402-1000r-21-0x0-5mm-10000st-41449490.pdf?src-supplier=Conrad, ComponentLink4URL=https://datasheet.ciiva.com/41449/001172203-da-01-en-drossel-0402-1000r-21-0x0-5mm-10000st-41449490.pdf?src-supplier=Conrad, ComponentLink5Description=https://datasheet.ciiva.com/3081/l0110s0101blm15h-3081607.pdf?src-supplier=Avnet, ComponentLink5URL=https://datasheet.ciiva.com/3081/l0110s0101blm15h-3081607.pdf?src-supplier=Avnet, ComponentLink6Description=https://datasheet.ciiva.com/17279/l0110s0101blm15h-17279639.pdf?src-supplier=Avnet+Europe, ComponentLink6URL=https://datasheet.ciiva.com/17279/l0110s0101blm15h-17279639.pdf?src-supplier=Avnet+Europe, ComponentLink7Description=https://datasheet.ciiva.com/1012/l0110s0101blm15h-1012788.pdf?src-supplier=Digi-Key, ComponentLink7URL=https://datasheet.ciiva.com/1012/l0110s0101blm15h-1012788.pdf?src-supplier=Digi-Key, ComponentLink8Description=https://datasheet.ciiva.com/1466/5168-1466916.pdf?src-supplier=Element14, ComponentLink8URL=https://datasheet.ciiva.com/1466/5168-1466916.pdf?src-supplier=Element14, ComponentLink9Description=https://datasheet.ciiva.com/1466/5168-1466915.pdf?src-supplier=Element14, ComponentLink9URL=https://datasheet.ciiva.com/1466/5168-1466915.pdf?src-supplier=Element14, ComponentLink10Description=https://datasheet.ciiva.com/1012/l0110s0101blm15h-1012789.pdf?src-supplier=Digi-Key, ComponentLink10URL=https://datasheet.ciiva.com/1012/l0110s0101blm15h-1012789.pdf?src-supplier=Digi-Key, ComponentLink11Description=https://datasheet.ciiva.com/1012/l0110s0101blm15h-1012790.pdf?src-supplier=Digi-Key, ComponentLink11URL=https://datasheet.ciiva.com/1012/l0110s0101blm15h-1012790.pdf?src-supplier=Digi-Key, Contact Plating=Tin,Matte, Core Material=Ferrite, DC Current=250mA, Depth=0.5mm, Height=0.5mm, Impedance=1kR, Lead Free="Lead Free", Length=1mm, Manufacturer 1=Murata, Manufacturer Part Number=BLM15HG102SN1D, Manufacturer Part Number 1=BLM15HG102SN1D, Material=Steel,Ferrite, Max Current Rating=250mA, Max DC Current=250mA, Military Standard=Not, Number of Circuits=1, Number of Lines=1, Number of Pins=2, Packaging="Tape and Reel", Pricing 1="1=0.19000, 10=0.14500, 25=0.12040, 50=0.10360, 100=0.09330, 250=0.07880, 500=0.07050, 1000=0.06013, 5000=0.05598 (USD)", Radiation Hardening=No, REACH SVHC="No SVHC", RoHS=Yes, Shielding=Unshielded, Stock 1=231333, Supplier 1=Digi-Key, Termination=SMD/SMT, Test Frequency=100MHz, Width=0.5mm
J1: "A compact PCB footprint which allows SOIC test clips to be used as a space-efficient programming and debugging connector", Manufacturer=SimonMerrett, Category=Connectors, ComponentLink1Description=https://github.com/SimonMerrett/SOICbite, ComponentLink1URL=https://github.com/SimonMerrett/SOICbite, Manufacturer Part Number=SOICbite
J2: "CONN USB MICRO B RECPT SMT R/A", Manufacturer=FCI, Supplier Part Number 1=609-4616-1-ND, Category 1="Connectors, Interconnects", Category 2="USB, DVI, HDMI Connectors", ComponentLink1Description=http://portal.fciconnect.com/Comergent//fci/drawing/10118193.pdf, ComponentLink1URL=http://portal.fciconnect.com/Comergent//fci/drawing/10118193.pdf, Connector Type="USB - micro B", Features="Shielded, Solder Retention", Gender=Receptacle, Ingress Protection=-, Manufacturer Part Number=10118193-0001LF, Mount="Surface Mount", Mounting Type="Surface Mount, Right Angle, Horizontal", Number of Contacts=5, Packaging="Cut Tape (CT)", Pricing 1="1=0.46, 10=0.433, 25=0.3712, 50=0.3156, 100=0.3032, 250=0.27224, 500=0.25988 (USD)", RoHS="RoHS Compliant", Specifications="USB 2.0", Stock 1=28642, Supplier 1=Digi-Key
J3: "CONN RCPT 20POS 0.4MM SMD", Current Rating=300mA, Insulation Resistance=50MR, Manufacturer=Hirose, Max Operating Temperature=85°C, Min Operating Temperature=-35°C, Package Quantity=1000, Supplier Part Number 1=H122165CT-ND, Voltage Rating=30V, Category="Headers and Wire Housings", ComponentLink1Description=https://datasheet.ciiva.com/29164/en-bm20-20130409-29164358.pdf?src-supplier=Digi-Key, ComponentLink1URL=https://datasheet.ciiva.com/29164/en-bm20-20130409-29164358.pdf?src-supplier=Digi-Key, Connector Type=Receptacle, Contact Plating=Gold, Housing Material=Polymer, Manufacturer Part Number=BM20B(0.8)-20DS-0.4V(53), Mated Stacking Heights=0.8mm, Mount="Surface Mount", Number of Positions=20, Number of Rows=2, Packaging="Tape and Reel", Pitch=0.016inch, Pricing 1="1=1.22000, 10=1.07100, 25=1.00800, 50=0.96600, 100=0.92400, 250=0.84000, 500=0.75600 (USD)", RoHS=Yes, RoHS Compliant=Yes, Stack Height=0.8mm, Stock 1=775, Supplier 1=Digi-Key, Termination=SMD/SMT
M1: "RX TXRX MODULE BLUETOOTH SMD", Case/Package=SMD/SMT, Frequency=2.4GHz, Manufacturer=u-blox, Max Operating Temperature=85°C, Min Operating Temperature=-40°C, Supplier Part Number 1=672-1101-1-ND, Category="RF Receivers, Transceivers", ComponentLink1Description=https://www.u-blox.com/sites/default/files/ANNA-B112_DataSheet_%28UBX-18011707%29.pdf?src-supplier=Digi-Key, ComponentLink1URL=https://www.u-blox.com/sites/default/files/ANNA-B112_DataSheet_%28UBX-18011707%29.pdf?src-supplier=Digi-Key, Data Rate=2Mbps, Interface=SPI,USB,UART, Manufacturer Part Number=ANNA-B112-00B, Packaging="Tape and Reel", Pricing 1="1=8.90000, 10=7.56700, 50=6.43180, 100=5.79880 (USD)", RoHS=No, Sensitivity=-96dBm, Stock 1=24, Supplier 1=Digi-Key
MIC1: "RAMIS MIC MULTIMODE DGT TOP PORT", Manufacturer=Knowles, Operating Supply Current=800uA, Supplier Part Number 1=423-1425-1-ND, Category=Microphones, ComponentLink1Description=https://www.knowles.com/docs/default-source/model-downloads/spk0641ht4h-1-rev-a.pdf?src-supplier=Digi-Key, ComponentLink1URL=https://www.knowles.com/docs/default-source/model-downloads/spk0641ht4h-1-rev-a.pdf?src-supplier=Digi-Key, Direction=Omnidirectional, Manufacturer Part Number=SPK0641HT4H-1, Output Type=Digital, Packaging="Cut Tape", Pricing 1="1=1.33000, 10=1.11100, 25=1.02840, 50=0.96800, 100=0.90970, 500=0.78270, 1000=0.73167 (USD)", RoHS=No, Shape=Rectangular, Stock 1=23510, Supplier 1=Digi-Key, Termination=Solder
OSC1: "MEMS OSC XO 32.7680KHZ LVCMOS", Frequency=32.768kHz, Frequency Stability=75ppm, Manufacturer=SiTime, Max Operating Temperature=70°C, Max Supply Current=1.3uA, Min Operating Temperature=-10°C, Supplier Part Number 1=1473-1313-1-ND, Category=Oscillators, ComponentLink1Description=http://www.sitime.com/products/datasheets/sit1532/SiT1532-datasheet.pdf?src-supplier=Digi-Key, ComponentLink1URL=http://www.sitime.com/products/datasheets/sit1532/SiT1532-datasheet.pdf?src-supplier=Digi-Key, ComponentLink2Description=https://www.sitime.com/datasheet/SiT1532?src-supplier=Digi-Key, ComponentLink2URL=https://www.sitime.com/datasheet/SiT1532?src-supplier=Digi-Key, Height=0.024inch, Length=0.061inch, Manufacturer Part Number=SIT1532AC-J5-DCC-32.768E, Mount="Surface Mount", Packaging="Tape and Reel", Pricing 1="1=1.25000, 10=1.10300, 50=1.03120, 100=0.91120, 500=0.86328 (USD)", RoHS=Yes, Stock 1=4488, Supplier 1=Digi-Key, Width=0.033inch
OSC2: "MEMS OSC XO 2.0480MHZ LVCMOS SMD", Frequency=2.048MHz, Frequency Stability=100ppm, Manufacturer=SiTime, Max Operating Temperature=85°C, Max Supply Current=130uA, Min Operating Temperature=-40°C, Supplier Part Number 1=1473-1352-1-ND, Category=Oscillators, ComponentLink1Description=http://www.sitime.com/products/datasheets/sit8021/SiT8021-datasheet.pdf?src-supplier=Digi-Key, ComponentLink1URL=http://www.sitime.com/products/datasheets/sit8021/SiT8021-datasheet.pdf?src-supplier=Digi-Key, ComponentLink2Description=https://www.sitime.com/datasheet/SiT8021?src-supplier=Digi-Key, ComponentLink2URL=https://www.sitime.com/datasheet/SiT8021?src-supplier=Digi-Key, Height=0.024inch, Length=0.061inch, Manufacturer Part Number=SIT8021AI-J4-18S-2.048000E, Mount="Surface Mount", Packaging="Tape and Reel", Pricing 1="1=1.21000, 10=1.07200, 50=1.00200, 100=0.97860 (USD)", RoHS=Yes, RoHS Compliant=Yes, Stock 1=1642, Supplier 1=Digi-Key, Width=0.033inch
Q1 Q2 Q3: "TRANS PREBIAS(4.7K, 47K) NPN 150MW VMT3", Case/Package=SOT-723, Collector Emitter Breakdown Voltage=50V, Collector-emitter Voltage-Max=300mV, Continuous Collector Current=100mA, Manufacturer=Rohm, Max Operating Temperature=150°C, Max Power Dissipation=150mW, Min Operating Temperature=-55°C, Package Quantity=1, Supplier Part Number 1=DTC143ZMT2LCT-ND, Transition Frequency=250MHz, Category=BJTs, Collector Emitter Voltage (VCEO)=50V, ComponentLink1Description=https://datasheet.ciiva.com/4461/dtc143ze-210891-4461009.pdf?src-supplier=Mouser, ComponentLink1URL=https://datasheet.ciiva.com/4461/dtc143ze-210891-4461009.pdf?src-supplier=Mouser, ComponentLink2Description=https://datasheet.ciiva.com/987/dtc143z-987431.pdf?src-supplier=Digi-Key, ComponentLink2URL=https://datasheet.ciiva.com/987/dtc143z-987431.pdf?src-supplier=Digi-Key, ComponentLink3Description=https://datasheet.ciiva.com/987/dtc143z-987432.pdf?src-supplier=Digi-Key, ComponentLink3URL=https://datasheet.ciiva.com/987/dtc143z-987432.pdf?src-supplier=Digi-Key, ComponentLink4Description=https://datasheet.ciiva.com/987/dtc143z-987433.pdf?src-supplier=Digi-Key, ComponentLink4URL=https://datasheet.ciiva.com/987/dtc143z-987433.pdf?src-supplier=Digi-Key, ComponentLink5Description=https://datasheet.ciiva.com/16432/dtc143ze-16432631.pdf?src-supplier=Future+Electronics, ComponentLink5URL=https://datasheet.ciiva.com/16432/dtc143ze-16432631.pdf?src-supplier=Future+Electronics, Current Rating=100mA, Element Configuration=Single, hFE Min=80, Lead Free="Lead Free", Manufacturer Part Number=DTC143ZMT2L, Max Breakdown Voltage=50V, Max Collector Current=100mA, Max Output Current=100mA, Mount="Surface Mount", Number of Pins=3, Operating Supply Voltage=50V, Packaging="Tape and Reel", Polarity=NPN, Power Dissipation=150mW, Pricing 1="1=0.35000, 10=0.28500, 25=0.23840, 100=0.15100, 500=0.09938, 1000=0.06758, 2500=0.06095 (USD)", Radiation Hardening=No, REACH SVHC="No SVHC", RoHS=Yes, RoHS Compliant=Yes, Series=-, Stock 1=43010, Supplier 1=Digi-Key, Termination=SMD/SMT, Voltage Rating (DC)=50V
R1: library part RC0201JR-07100KL, "RES SMD 100K OHM 5% 1/20W 0201", Case Code (Imperial)=0201, Case Code (Metric)=0603, Manufacturer=Yageo, Max Operating Temperature=125°C, Max Power Dissipation=50mW, Min Operating Temperature=-55°C, Package Quantity=1, Resistance=100kR, Resistance Tolerance=5%, Resistor Type="Thick Film", Supplier Part Number 1=311-100KNCT-ND, Temperature Coefficient=200ppm/°C, Voltage Rating=25V, Case/Package=0201, Category="Chip SMD Resistors", ComponentLink1Description=https://datasheet.ciiva.com/2462/pyu-r-int-thick-7-2462817.pdf?src-supplier=Digi-Key, ComponentLink1URL=https://datasheet.ciiva.com/2462/pyu-r-int-thick-7-2462817.pdf?src-supplier=Digi-Key, ComponentLink2Description=https://datasheet.ciiva.com/2462/pyu-r-int-thick-7-2462818.pdf?src-supplier=Digi-Key, ComponentLink2URL=https://datasheet.ciiva.com/2462/pyu-r-int-thick-7-2462818.pdf?src-supplier=Digi-Key, ComponentLink3Description=https://datasheet.ciiva.com/2462/pyu-r-int-thick-7-2462819.pdf?src-supplier=Digi-Key, ComponentLink3URL=https://datasheet.ciiva.com/2462/pyu-r-int-thick-7-2462819.pdf?src-supplier=Digi-Key, ComponentLink4Description=https://datasheet.ciiva.com/28639/1421516-28639863.pdf?src-supplier=Element14, ComponentLink4URL=https://datasheet.ciiva.com/28639/1421516-28639863.pdf?src-supplier=Element14, ComponentLink5Description=https://datasheet.ciiva.com/8888/pyu-rc0201-51-rohs-l-8-8888005.pdf?src-supplier=Avnet, ComponentLink5URL=https://datasheet.ciiva.com/8888/pyu-rc0201-51-rohs-l-8-8888005.pdf?src-supplier=Avnet, ComponentLink6Description=https://datasheet.ciiva.com/8896/pyu-rc0201-51-rohs-l-8-8896213.pdf?src-supplier=Avnet, ComponentLink6URL=https://datasheet.ciiva.com/8896/pyu-rc0201-51-rohs-l-8-8896213.pdf?src-supplier=Avnet, ComponentLink7Description=https://datasheet.ciiva.com/7672/1563626-7672249.pdf?src-supplier=Element14, ComponentLink7URL=https://datasheet.ciiva.com/7672/1563626-7672249.pdf?src-supplier=Element14, ComponentLink8Description=https://datasheet.ciiva.com/7672/1563626-7672250.pdf?src-supplier=Element14, ComponentLink8URL=https://datasheet.ciiva.com/7672/1563626-7672250.pdf?src-supplier=Element14, ComponentLink9Description=https://datasheet.ciiva.com/28395/pyu-rc0201-51-rohs-l-8-28395542.pdf?src-supplier=Avnet+Europe, ComponentLink9URL=https://datasheet.ciiva.com/28395/pyu-rc0201-51-rohs-l-8-28395542.pdf?src-supplier=Avnet+Europe, Construction=Rectangular, Contact Plating=Tin,Matte, Depth=0.3mm, Features="Moisture Resistant", Height=0.01inch, Lead Free="Lead Free", Length=0.6mm, Manufacturer Part Number=RC0201JR-07100KL, Military Standard=Not, Number of Terminations=2, Packaging="Tape and Reel", Power Rating=50mW, Pricing 1="1=0.10000, 10=0.02900, 100=0.01190, 1000=0.00536, 2500=0.00466, 5000=0.00385 (USD)", Radiation Hardening=No, REACH SVHC="No SVHC", RoHS=Yes, RoHS Compliant=Yes, Series=RC, Size Code=0201, Stock 1=18115, Supplier 1=Digi-Key, Termination=SMD/SMT, Tolerance=5%, Voltage Rating (DC)=25V, Weight=6E-06oz, Width=0.012inch
R2 R4 R5 R9 R10 R11 R12 R15: library part RC0201FR-0710KL, "RES SMD 10K OHM 1% 1/20W 0201", Case Code (Imperial)=0201, Case Code (Metric)=0603, Manufacturer=Yageo, Max Operating Temperature=125°C, Max Power Dissipation=50mW, Min Operating Temperature=-55°C, Package Quantity=1, Resistance=10kR, Resistor Type="Thick Film", Supplier Part Number 1=311-10.0KMCT-ND, Temperature Coefficient=200ppm/°C, Tolerance=1%, Voltage Rating=25V, Case/Package=0201, Category="Chip SMD Resistors", ComponentLink1Description=https://datasheet.ciiva.com/2467/pyu-r-int-thick-7-2467109.pdf?src-supplier=Digi-Key, ComponentLink1URL=https://datasheet.ciiva.com/2467/pyu-r-int-thick-7-2467109.pdf?src-supplier=Digi-Key, ComponentLink2Description=https://datasheet.ciiva.com/2467/pyu-r-int-thick-7-2467110.pdf?src-supplier=Digi-Key, ComponentLink2URL=https://datasheet.ciiva.com/2467/pyu-r-int-thick-7-2467110.pdf?src-supplier=Digi-Key, ComponentLink3Description=https://datasheet.ciiva.com/2467/pyu-r-int-thick-7-2467111.pdf?src-supplier=Digi-Key, ComponentLink3URL=https://datasheet.ciiva.com/2467/pyu-r-int-thick-7-2467111.pdf?src-supplier=Digi-Key, ComponentLink4Description=https://datasheet.ciiva.com/7660/1421516-7660807.pdf?src-supplier=Element14, ComponentLink4URL=https://datasheet.ciiva.com/7660/1421516-7660807.pdf?src-supplier=Element14, ComponentLink5Description=https://datasheet.ciiva.com/8891/pyu-rc0201-51-rohs-l-8-8891384.pdf?src-supplier=Avnet, ComponentLink5URL=https://datasheet.ciiva.com/8891/pyu-rc0201-51-rohs-l-8-8891384.pdf?src-supplier=Avnet, ComponentLink6Description=https://datasheet.ciiva.com/28405/pyu-rc0201-51-rohs-l-8-28405609.pdf?src-supplier=Avnet+Europe, ComponentLink6URL=https://datasheet.ciiva.com/28405/pyu-rc0201-51-rohs-l-8-28405609.pdf?src-supplier=Avnet+Europe, ComponentLink7Description=https://datasheet.ciiva.com/26829/getdatasheetpartid-421074-26829851.pdf?src-supplier=Verical, ComponentLink7URL=https://datasheet.ciiva.com/26829/getdatasheetpartid-421074-26829851.pdf?src-supplier=Verical, ComponentLink8Description=https://datasheet.ciiva.com/46391/1421516-46391339.pdf?src-supplier=Element14, ComponentLink8URL=https://datasheet.ciiva.com/46391/1421516-46391339.pdf?src-supplier=Element14, ComponentLink9Description=https://datasheet.ciiva.com/16855/pyu-rc0201-51-rohs-l-8-16855789.pdf?src-supplier=Avnet+Europe, ComponentLink9URL=https://datasheet.ciiva.com/16855/pyu-rc0201-51-rohs-l-8-16855789.pdf?src-supplier=Avnet+Europe, Contact Plating=Tin,Matte, Depth=0.3mm, Features="Moisture Resistant", Height=0.01inch, Lead Free="Lead Free", Length=0.6mm, Manufacturer Part Number=RC0201FR-0710KL, Military Standard=Not, Number of Pins=2, Number of Terminations=2, Packaging="Tape and Reel", Power Rating=50mW, Pricing 1="1=0.10000, 10=0.03700, 100=0.01500, 1000=0.00673, 2500=0.00584, 5000=0.00483 (USD)", Radiation Hardening=No, REACH SVHC="No SVHC", RoHS=Yes, Stock 1=7662035, Supplier 1=Digi-Key, Termination=SMD/SMT, Voltage Rating (DC)=25V, Weight=6E-06oz, Width=0.3mm, Working Voltage=25V
R3 R7 R8 R14: library part RC0201FR-07100RL, "RES SMD 100 OHM 1% 1/20W 0201", Case Code (Imperial)=0201, Case Code (Metric)=0603, Manufacturer=Yageo, Max Operating Temperature=125°C, Max Power Dissipation=50mW, Min Operating Temperature=-55°C, Package Quantity=1, Resistor Type="Thick Film", Supplier Part Number 1=311-100MCT-ND, Temperature Coefficient=200ppm/°C, Tolerance=1%, Voltage Rating=25V, Case/Package=0201, Category="Chip SMD Resistors", ComponentLink1Description=https://datasheet.ciiva.com/2560/pyu-r-int-thick-7-2560865.pdf?src-supplier=Digi-Key, ComponentLink1URL=https://datasheet.ciiva.com/2560/pyu-r-int-thick-7-2560865.pdf?src-supplier=Digi-Key, ComponentLink2Description=https://datasheet.ciiva.com/2560/pyu-r-int-thick-7-2560866.pdf?src-supplier=Digi-Key, ComponentLink2URL=https://datasheet.ciiva.com/2560/pyu-r-int-thick-7-2560866.pdf?src-supplier=Digi-Key, ComponentLink3Description=https://datasheet.ciiva.com/2560/pyu-r-int-thick-7-2560867.pdf?src-supplier=Digi-Key, ComponentLink3URL=https://datasheet.ciiva.com/2560/pyu-r-int-thick-7-2560867.pdf?src-supplier=Digi-Key, ComponentLink4Description=https://datasheet.ciiva.com/16855/pyu-rc0201-51-rohs-l-8-16855781.pdf?src-supplier=Avnet+Europe, ComponentLink4URL=https://datasheet.ciiva.com/16855/pyu-rc0201-51-rohs-l-8-16855781.pdf?src-supplier=Avnet+Europe, ComponentLink5Description=https://datasheet.ciiva.com/8887/pyu-rc0201-51-rohs-l-8-8887865.pdf?src-supplier=Avnet, ComponentLink5URL=https://datasheet.ciiva.com/8887/pyu-rc0201-51-rohs-l-8-8887865.pdf?src-supplier=Avnet, ComponentLink6Description=https://datasheet.ciiva.com/28395/pyu-rc0201-51-rohs-l-8-28395391.pdf?src-supplier=Avnet+Europe, ComponentLink6URL=https://datasheet.ciiva.com/28395/pyu-rc0201-51-rohs-l-8-28395391.pdf?src-supplier=Avnet+Europe, Contact Plating=Tin,Matte, Features="Moisture Resistant", Height=0.01inch, Lead Free="Lead Free", Length=0.024inch, Manufacturer Part Number=RC0201FR-07100RL, Number of Terminations=2, Packaging="Tape and Reel", Power Rating=50mW, Pricing 1="1=0.10000, 10=0.03700, 100=0.01500, 1000=0.00673, 2500=0.00584, 5000=0.00483 (USD)", Radiation Hardening=No, REACH SVHC=Unknown, Resistance=100R, RoHS=Yes, Stock 1=263416, Supplier 1=Digi-Key, Termination=SMD/SMT, Width=0.012inch